# Altium PCB model plat.PcbDoc
Units mm, origin at the board's own origin, x right, y up, seen from the top; angles counter-clockwise.
Board outline 100 x 50 mm, 2 copper layers (Top Layer, Bottom Layer); 12 components, 12 nets, 24 pads, 0 vias.
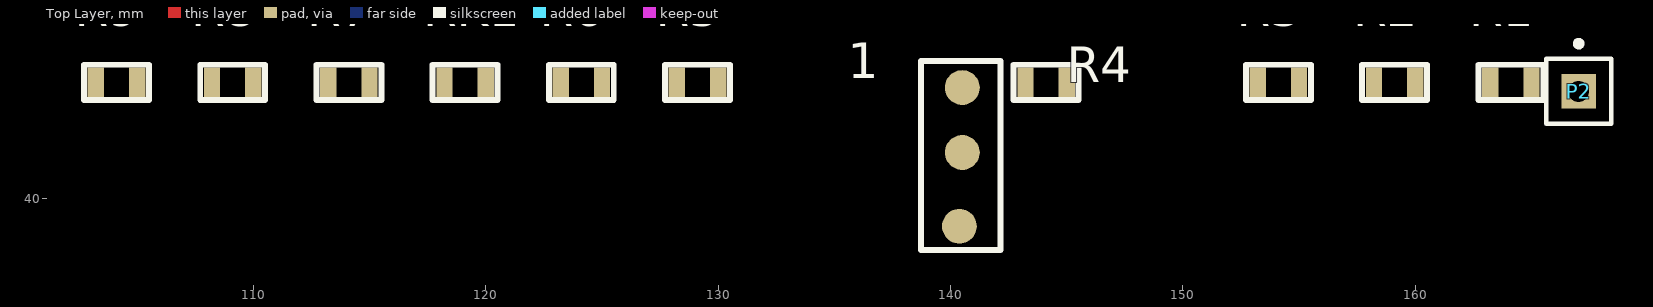
[diagram p0: Top Layer view]
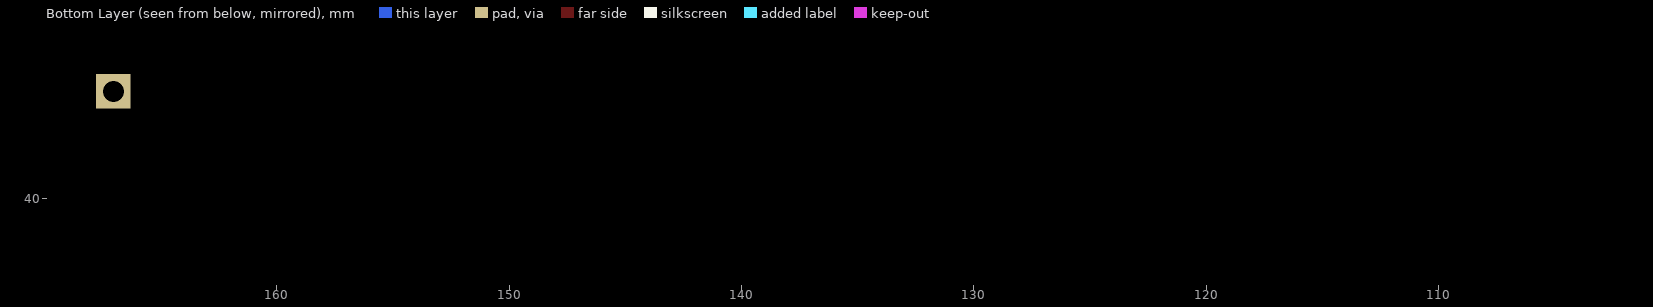
[diagram p1: Bottom Layer view, seen from below]

## Layer stack, top to bottom
Top Solder: solder mask 0.0102, Solder Resist, Dk 3.5
Top Layer: signal copper 0.0356
Dielectric 1: dielectric 0.32, FR-4, Dk 4.8
Bottom Layer: signal copper 0.0356
Bottom Solder: solder mask 0.0102, Solder Resist, Dk 3.5

## Board outline
0,0 100,0 100,50 0,50

## Design rules (kind name [scope] priority, off if disabled: settings)
Clearance [All] p1: gap=0.254 ignorepadtopadclearanceinfootprint=FALSE except(0: Arc-Hole Track-Hole SMDPad-Hole THPad-Hole Via-Hole Fill-Hole Poly-Hole Region-Hole Text-Hole)
PolygonConnect [All] p1: connectstyle=Relief reliefconductorwidth=0.254 reliefentries=4 polygonreliefangle="90 Angle" airgapwidth=0.254
RoomDefinition Э3 [InComponentClass('Э3')] p1: confinementstyle=ConfineIn formatcopy=TRUE lockcomponents=FALSE outline 97.032,4.619 172.032,4.619 172.032,49.619 97.032,49.619
RoutingVias [All] p1: holewidth=0.711 width=1.27 viastyle="Through Hole" minholewidth=0.711 minwidth=1.27 maxholewidth=0.711 maxwidth=1.27
SolderMaskExpansion [All] p1: expansion=0.102
Width [All] p1: maxlimit=0.254 minlimit=0.254 preferedwidth=0.254
30 further rules are at their usual default settings.

## Components (designator, comment, footprint, x,y, rotation, side; value= is the part's Value field where it differs from the comment)
1 "BD139" transistor 142.032,34.619 r0 top
P2 "XY123-01P" PIN1 167.032,44.619 r0 top
R1 "470Ом, 1Вт, ±5%" "Resistor SMD 0805" 167.032,44.619 r0 top
R2 "1КОМ" "Resistor SMD 0805" 162.032,44.619 r0 top
R3 "18кОм,  ±5%" "Resistor SMD 0805" 157.032,44.619 r0 top
R4 "10 КОМ-5%-0805" "Resistor SMD 0805" 147.032,44.619 r0 top
R5 "4,7КОМ-1%-0805" "Resistor SMD 0805" 132.032,44.619 r0 top
R6 "10 КОМ-5%-0805" "Resistor SMD 0805" 127.032,44.619 r0 top
R7 "2.7 КОМ-5%-0805" "Resistor SMD 0805" 117.032,44.619 r0 top value="resistor2.7 кОм-5%-0805"
R8 "1 КОМ-5%-0805" "Resistor SMD 0805" 112.032,44.619 r0 top
R9 "resistor 470Ом, 1Вт, ±5%" "Resistor SMD 0805" 107.032,44.619 r0 top
RK1 "1КОМ-0805" "Resistor SMD 0805" 122.032,44.619 r0 top value="0805 5% 100KОм"

## Footprints (in the part's own frame and the unit in brackets; to place one, negate y for a bottom-side part, rotate by r counter-clockwise, add the part's x,y. Pads: shape width x height; smd on the part's side, far side on the other; paste and mask are expansions set on the pad)
PIN1 [mm] "Connector; Plug"
  rect 1.5x1.5 hole 0.9: 1(0,0)
  silkscreen extent -1.4,-1.4 1.4,2.17
"Resistor SMD 0805" [mm]
  rect 0.7x1.3 smd: 0(-3.81,0.381) 1(-2.032,0.381)
  silkscreen extent -4.32,-0.38 -1.52,1.14, body extent -3.92,-0.22 -1.92,0.98, height 0.61
transistor [mm]
  round 1.5 smd: 1(-1.651,4.191) 2(-1.524,7.366) 3(-1.524,10.16)
  silkscreen extent -3.3,3.17 0.13,11.3, body extent -2.9,3.21 0,11.01

## Part data
1: library part transistor, manufacture=STMicroelectronics, href=https://www.chipdip.ru/product/bd139-stm, partnamber=BD139
P2: library part Socket, "Socket", manufacture="Ningbo Xinya M&E", href=https://www.chipdip.ru/product/xy123-01p?utm_source=direct&utm_medium=cpc&utm_campaign=Y_dinamicheskaya&utm_content=text1_ya&utm_term=---autotargeting&position_type=premium&etext=2202.BJlwkJCtsc2iPl2l8AcNu2w34xO8na-B6UvzKP2fbPptbm5mdGtwY2pvb3puamNr.5ad2068e74d0529f82c720e105e143f7eb2b08ba&yclid=2787476848863870975, LatestRevisionDate=17-Jul-2002, LatestRevisionNote="Re-released for DXP Platform.", portnumber=XY123V-2.54-1P-14, Publisher="Altium Limited"
R1 R9: library part resistor_SMD0805, Manufacturer="ROYAL OHM", partnamber=KNPA1WJ0471A10, chrev=https://www.chipdip.ru/product0/9000856850
R2: library part "resistor peremen"
R3: library part resistor_SMD0805, partnamber=PMR03SJ0183A19, chrev=https://www.chipdip.ru/product0/9001404636, Производительность="Резистор: Power metal, THT, 18кОм, 3Вт, ±5%"
R4 R6: library part resistor_SMD0805, partnamber=CF-1W-10KJ, chrev=https://www.chipdip.ru/product/cf-100-s1-4-1w-10-kom-5, Производительность=10кОм
R5: library part resistor_SMD0805, partnamber="0805 1% 4K7 RI0805L4701FT", chrev=https://www.chipdip.ru/product0/8013449358?from=suggest_product, Производительность="1% 4K7"
R7: library part resistor_SMD0805, manufacture=Hottech, partnamber="0805 5% 2K7 RI0805L272JT", chrev=https://www.chipdip.ru/product0/8009027056?from=suggest_product
R8: library part resistor_SMD0805, partnamber="0805 5% 1K RI0805L102JT", chrev=https://www.chipdip.ru/product0/8009027047, Производительность="0805 5% 1K"
RK1: library part "resistor temerature", manufacture="Murata Electronics", partnamber=NCP21WF104J03RA, Temperature=-40...125, href=https://www.chipdip.ru/product/ncp21wf104j03ra

## Nets (pads, with @x,y where several pads share a name; then routed paths per layer and width w, separated by ;. In a path a pad name is that pad's centre, name@x,y a point inside that pad or via, vN(x,y) a via of type N, cw(c..) or ccw(c..) an arc to the next point about the centre after c; other vN are vias at no path point)
GND: 
Net1_3: 1.3
Net1_4: 
NetD1_3: 
NetEC1_3: P2.1
NetEC2_3: 
NetEC3_3: 
NetR2_2: 
NetR3_3: 
NetR4_2: 
NetR5_3: 
NetR6_2: 
pads on no net: 1.1 1.2 R1.0 R1.1 R2.0 R2.1 R3.0 R3.1 R4.0 R4.1 R5.0 R5.1 R6.0 R6.1 R7.0 R7.1 R8.0 R8.1 R9.0 R9.1 RK1.0 RK1.1

## Silkscreen, mask and mechanical layers (free items; w line width, h text height)
Border:
  the board outline again, w0.2